# Altium PCB BMS.PcbDoc (part 2 of 2)
Units mm, origin at the board's own origin, x right, y up, seen from the top; angles counter-clockwise.
Board outline 152.4 x 101.6 mm, 20 copper layers (F.Cu, F.Mask, B.Cu, B.Mask, In1.Cu, F.SilkS, In2.Cu, B.SilkS, F.Adhes, B.Adhes, F.Paste, B.Paste, Dwgs.User, Cmts.User, Eco1.User, Eco2.User, Edge.Cuts, Margin, B.CrtYd, F.CrtYd); 59 components, 46 nets, 180 pads, 56 vias.
Unrouted connection lines stored in the file: 55.
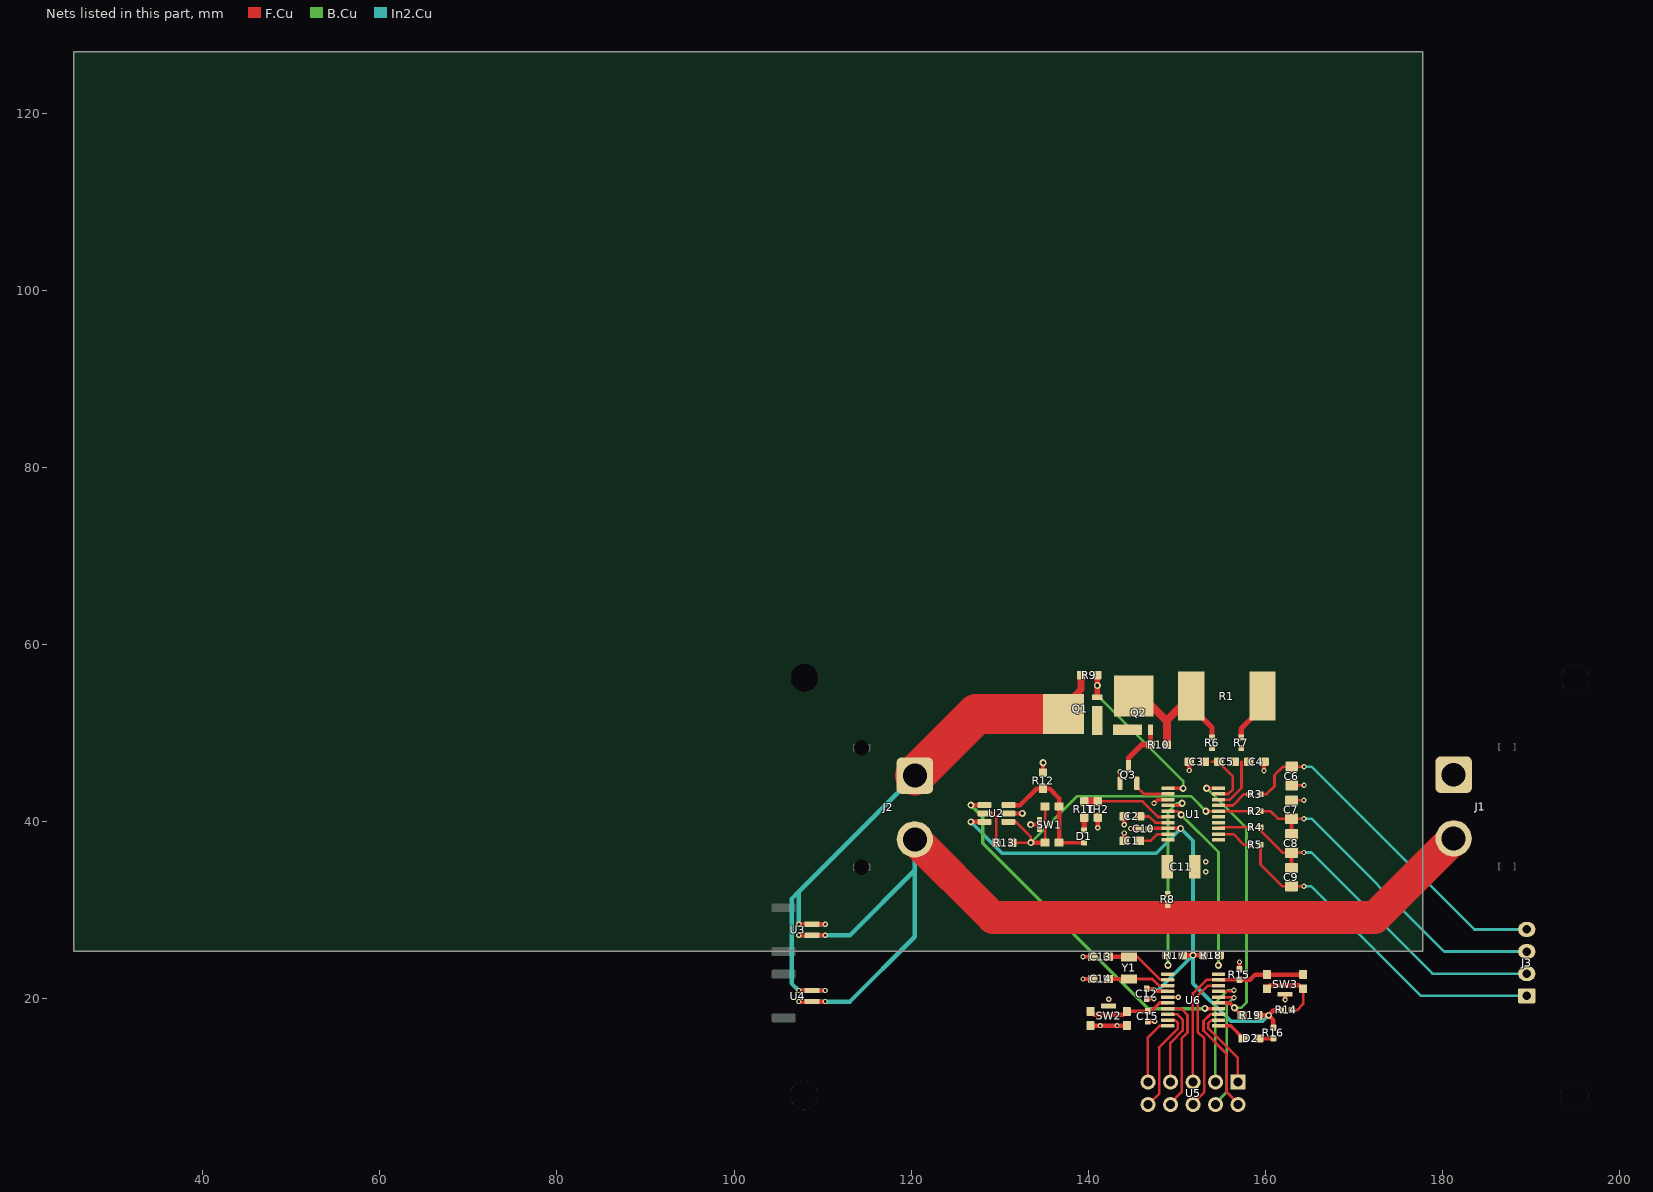
[diagram p11: the nets of this part, all layers, seen from the top]

## Footprints (in the part's own frame and the unit in brackets; to place one, negate y for a bottom-side part, rotate by r counter-clockwise, add the part's x,y. Pads: shape width x height; smd on the part's side, far side on the other; paste and mask are expansions set on the pad) (continued)
riven_sword_20mm_quality_mirrored [mm]
  F.SilkS region: 1800 vertices and 57 holes, not listed, extent -8.536,0.287 2.674,6.27
  F.SilkS region: 618 vertices and 59 holes, not listed, extent -2.404,2.179 5.659,5.091
  F.SilkS region: 702 vertices and 14 holes, not listed, extent -5.682,2.9 -3.173,5.551
  F.SilkS region: 537 vertices and 22 holes, not listed, extent 4.599,1.139 9.224,6.409
  F.SilkS region: 157 vertices and 5 holes, not listed, extent -9.217,3.808 -8.422,4.64
  F.SilkS region: -1.636,2.104 -1.628,2.102 -1.639,2.098 -1.641,2.097 -1.675,2.09 -1.722,2.082 -1.776,2.072 -1.832,2.063 -1.882,2.056 -1.92,2.051 -1.943,2.048 -1.999,2.041 -2.064,2.032 -2.134,2.022 -2.202,2.011 -2.265,2.001 -2.317,1.991 -2.353,1.984 -2.359,1.983 -2.423,1.968 -2.472,1.958 -2.51,1.951 -2.54,1.947 -2.551,1.946 -2.604,1.937 -2.673,1.924 -2.757,1.906 -2.853,1.883 -2.891,1.874 -2.94,1.863 -2.982,1.853 -3.009,1.847 -3.044,1.84 -3.096,1.827 -3.158,1.812 -3.223,1.796 -3.256,1.787 -3.306,1.773 -3.362,1.758 -3.42,1.741 -3.471,1.727 -3.509,1.715 -3.526,1.711 -3.565,1.701 -3.598,1.694 -3.601,1.694 -3.628,1.687 -3.645,1.681 -3.653,1.676 -3.678,1.666 -3.71,1.655 -3.715,1.653 -3.754,1.638 -3.8,1.618 -3.846,1.597 -3.862,1.589 -3.9,1.57 -3.923,1.56 -3.936,1.558 -3.941,1.562 -3.942,1.571 -3.94,1.578 -3.926,1.587 -3.915,1.588 -3.892,1.597 -3.884,1.601 -3.854,1.616 -3.818,1.631 -3.782,1.645 -3.753,1.656 -3.737,1.66 -3.732,1.66 -3.709,1.667 -3.68,1.68 -3.678,1.681 -3.658,1.69 -3.635,1.699 -3.605,1.709 -3.565,1.722 -3.512,1.738 -3.442,1.759 -3.393,1.773 -3.328,1.79 -3.257,1.809 -3.185,1.828 -3.117,1.845 -3.058,1.858 -3.014,1.868 -3,1.871 -2.934,1.885 -2.857,1.904 -2.777,1.924 -2.751,1.93 -2.703,1.94 -2.647,1.951 -2.592,1.962 -2.551,1.969 -2.496,1.979 -2.447,1.989 -2.412,1.998 -2.388,2.004 -2.364,2.009 -2.336,2.015 -2.301,2.021 -2.255,2.029 -2.195,2.039 -2.118,2.052 -2.018,2.067 -1.92,2.082 -1.836,2.092 -1.765,2.099 -1.702,2.103 -1.664,2.104
  F.SilkS region: 8.675,6.056 8.674,6.053 8.663,6.046 8.651,6.041 8.627,6.027 8.598,6.006 8.562,5.981 8.516,5.952 8.472,5.926 8.469,5.925 8.428,5.902 8.389,5.879 8.36,5.862 8.349,5.855 8.326,5.843 8.314,5.837 8.308,5.836 8.286,5.826 8.252,5.811 8.212,5.791 8.207,5.789 8.157,5.764 8.104,5.739 8.052,5.715 8.006,5.694 7.967,5.676 7.94,5.665 7.929,5.66 7.925,5.659 7.907,5.652 7.88,5.641 7.861,5.632 7.82,5.615 7.779,5.598 7.766,5.592 7.732,5.578 7.7,5.565 7.661,5.548 7.611,5.526 7.597,5.52 7.566,5.51 7.545,5.506 7.524,5.506 7.545,5.514 7.557,5.518 7.597,5.535 7.624,5.549 7.633,5.558 7.639,5.564 7.658,5.567 7.675,5.57 7.696,5.582 7.708,5.591 7.733,5.598 7.748,5.6 7.76,5.606 7.762,5.608 7.779,5.62 7.815,5.638 7.868,5.663 7.941,5.695 7.952,5.701 7.994,5.719 8.031,5.736 8.055,5.748 8.057,5.749 8.081,5.76 8.095,5.764 8.1,5.766 8.122,5.775 8.156,5.791 8.2,5.812 8.25,5.836 8.302,5.862 8.352,5.888 8.398,5.911 8.436,5.931 8.462,5.946 8.472,5.953 8.477,5.957 8.495,5.962 8.499,5.963 8.52,5.972 8.546,5.989 8.553,5.994 8.576,6.009 8.591,6.015 8.594,6.015 8.602,6.023 8.603,6.025 8.615,6.036 8.639,6.049 8.647,6.052 8.667,6.059
  F.SilkS region: 2.554,5.082 2.749,5.082 2.941,5.082 3.128,5.082 3.309,5.081 3.484,5.081 3.651,5.081 3.81,5.08 3.959,5.079 4.096,5.079 4.222,5.078 4.334,5.077 4.433,5.077 4.516,5.076 4.582,5.075 4.631,5.074 4.661,5.073 4.672,5.072 4.672,5.07 4.662,5.06 4.64,5.049 4.632,5.046 4.602,5.038 4.586,5.038 4.578,5.048 4.574,5.05 4.562,5.052 4.541,5.054 4.509,5.055 4.467,5.056 4.413,5.058 4.346,5.059 4.266,5.06 4.171,5.06 4.061,5.061 3.934,5.062 3.79,5.062 3.628,5.063 3.447,5.063 3.246,5.064 3.119,5.064 2.911,5.064 2.69,5.065 2.459,5.065 2.222,5.065 1.981,5.066 1.741,5.066 1.504,5.067 1.275,5.067 1.056,5.068 0.851,5.068 0.663,5.068 0.634,5.068 0.456,5.069 0.299,5.069 0.161,5.07 0.043,5.07 -0.056,5.07 -0.137,5.071 -0.199,5.071 -0.244,5.071 -0.27,5.072 -0.28,5.072 -0.274,5.073 -0.251,5.073 -0.213,5.074 -0.159,5.074 -0.09,5.075 -0.007,5.076 0.09,5.077 0.098,5.077 0.223,5.078 0.361,5.078 0.509,5.079 0.668,5.08 0.835,5.08 1.01,5.081 1.192,5.081 1.379,5.082 1.57,5.082 1.765,5.082 1.962,5.082 2.16,5.082 2.358,5.082
  F.SilkS region: 1.706,2.164 1.706,2.164 1.718,2.163 1.75,2.163 1.799,2.162 1.866,2.161 1.947,2.16 2.043,2.16 2.151,2.159 2.271,2.159 2.4,2.159 2.538,2.158 2.683,2.158 2.834,2.158 3,2.159 3.188,2.159 3.355,2.158 3.503,2.158 3.632,2.157 3.741,2.156 3.833,2.155 3.906,2.154 3.962,2.152 4.001,2.15 4.023,2.148 4.027,2.147 4.076,2.141 4.133,2.135 4.186,2.13 4.203,2.129 4.242,2.124 4.271,2.12 4.284,2.116 4.284,2.116 4.275,2.113 4.249,2.112 4.211,2.112 4.162,2.113 4.161,2.113 4.132,2.114 4.084,2.115 4.018,2.116 3.936,2.117 3.84,2.117 3.73,2.118 3.609,2.119 3.478,2.12 3.338,2.121 3.191,2.122 3.039,2.123 2.883,2.124 2.851,2.124 2.669,2.125 2.5,2.126 2.345,2.128 2.206,2.129 2.082,2.13 1.975,2.132 1.885,2.133 1.814,2.135 1.761,2.137 1.727,2.138 1.714,2.14 1.703,2.148 1.695,2.161 1.696,2.165
  F.SilkS region: 1.33,2.143 1.32,2.138 1.299,2.123 1.284,2.114 1.257,2.106 1.254,2.106 1.232,2.105 1.191,2.105 1.134,2.105 1.061,2.104 0.975,2.104 0.876,2.104 0.767,2.104 0.649,2.104 0.523,2.105 0.392,2.105 0.36,2.105 0.227,2.106 0.097,2.106 -0.027,2.106 -0.144,2.107 -0.252,2.107 -0.348,2.107 -0.431,2.107 -0.498,2.108 -0.549,2.108 -0.581,2.108 -0.591,2.108 -0.639,2.108 -0.677,2.11 -0.702,2.112 -0.709,2.114 -0.707,2.115 -0.689,2.116 -0.652,2.117 -0.597,2.118 -0.526,2.119 -0.441,2.121 -0.343,2.122 -0.233,2.123 -0.112,2.125 0.017,2.126 0.153,2.127 0.296,2.128 0.345,2.129 0.486,2.13 0.621,2.131 0.748,2.132 0.867,2.134 0.975,2.135 1.071,2.136 1.154,2.138 1.221,2.139 1.272,2.14 1.306,2.141 1.32,2.143 1.333,2.146
  F.SilkS region: -1.826,5.046 -1.818,5.036 -1.817,5.014 -1.822,4.989 -1.832,4.968 -1.842,4.953 -1.848,4.933 -1.848,4.933 -1.855,4.915 -1.872,4.895 -1.897,4.872 -2.463,4.876 -2.489,4.876 -2.604,4.877 -2.708,4.878 -2.801,4.88 -2.881,4.882 -2.946,4.883 -2.996,4.885 -3.027,4.887 -3.039,4.889 -3.04,4.89 -3.043,4.897 -3.035,4.903 -3.015,4.908 -2.982,4.913 -2.934,4.916 -2.87,4.92 -2.788,4.922 -2.686,4.925 -2.539,4.928 -2.405,4.931 -2.288,4.935 -2.189,4.938 -2.105,4.942 -2.036,4.945 -1.98,4.949 -1.935,4.954 -1.901,4.958 -1.876,4.964 -1.874,4.964 -1.849,4.973 -1.839,4.985 -1.837,5.01 -1.837,5.014 -1.834,5.037 -1.827,5.046
  F.SilkS region: -4.754,4.279 -4.735,4.264 -4.728,4.256 -4.72,4.235 -4.728,4.211 -4.752,4.178 -4.775,4.164 -4.809,4.16 -4.845,4.167 -4.875,4.186 -4.877,4.188 -4.893,4.209 -4.9,4.225 -4.896,4.238 -4.882,4.259 -4.863,4.277 -4.846,4.285 -4.843,4.28 -4.852,4.266 -4.867,4.24 -4.864,4.211 -4.843,4.187 -4.835,4.182 -4.819,4.176 -4.802,4.179 -4.775,4.191 -4.771,4.194 -4.747,4.208 -4.74,4.219 -4.744,4.233 -4.752,4.245 -4.765,4.259 -4.771,4.265 -4.775,4.278 -4.767,4.285
  F.SilkS region: -4.78,0.67 -4.793,0.655 -4.81,0.636 -4.825,0.62 -4.842,0.604 -4.863,0.586 -4.894,0.56 -4.937,0.525 -4.973,0.494 -5.026,0.448 -5.081,0.398 -5.129,0.352 -5.134,0.348 -5.173,0.311 -5.209,0.278 -5.237,0.254 -5.254,0.241 -5.254,0.241 -5.277,0.229 -5.285,0.231 -5.278,0.248 -5.27,0.258 -5.247,0.283 -5.212,0.317 -5.167,0.359 -5.115,0.406 -5.058,0.457 -4.999,0.508 -4.94,0.558 -4.883,0.605 -4.832,0.646 -4.788,0.68 -4.739,0.716
  F.SilkS region: 6.468,5.192 6.465,5.186 6.464,5.186 6.447,5.178 6.416,5.169 6.378,5.162 6.371,5.161 6.318,5.153 6.257,5.143 6.191,5.133 6.127,5.122 6.068,5.113 6.02,5.105 5.987,5.099 5.962,5.095 5.917,5.092 5.872,5.09 5.805,5.09 5.899,5.104 5.909,5.105 5.963,5.114 6.017,5.122 6.06,5.128 6.069,5.13 6.144,5.141 6.229,5.155 6.316,5.17 6.397,5.184 6.432,5.19 6.458,5.193
  F.SilkS region: 5.734,5.094 5.739,5.092 5.731,5.089 5.713,5.083 5.695,5.077 5.669,5.068 5.656,5.062 5.65,5.061 5.626,5.059 5.588,5.057 5.538,5.056 5.48,5.056 5.419,5.056 5.373,5.057 5.342,5.059 5.324,5.062 5.317,5.066 5.316,5.072 5.32,5.077 5.333,5.083 5.359,5.085 5.402,5.085 5.444,5.084 5.5,5.085 5.561,5.087 5.622,5.09 5.678,5.093 5.714,5.094
  F.SilkS region: 8.806,4.531 8.799,4.513 8.784,4.483 8.765,4.446 8.743,4.405 8.72,4.365 8.699,4.329 8.681,4.302 8.68,4.3 8.656,4.268 8.641,4.254 8.635,4.258 8.635,4.263 8.642,4.285 8.659,4.311 8.665,4.32 8.68,4.341 8.685,4.354 8.688,4.359 8.7,4.379 8.718,4.408 8.74,4.442 8.763,4.476 8.784,4.506 8.799,4.527 8.806,4.535
  F.SilkS region: 7.621,2.948 7.615,2.935 7.609,2.927 7.587,2.901 7.555,2.87 7.517,2.835 7.478,2.802 7.475,2.799 7.446,2.781 7.427,2.78 7.416,2.795 7.416,2.803 7.428,2.803 7.437,2.8 7.443,2.805 7.443,2.807 7.454,2.819 7.476,2.84 7.507,2.864 7.513,2.868 7.548,2.895 7.579,2.919 7.6,2.935 7.601,2.936 7.618,2.949
  F.SilkS region: 9.45,6.421 9.452,6.4 9.449,6.361 9.447,6.339 9.44,6.295 9.431,6.242 9.421,6.188 9.41,6.137 9.401,6.096 9.393,6.069 9.386,6.054 9.38,6.046 9.378,6.051 9.378,6.072 9.382,6.104 9.387,6.14 9.394,6.176 9.397,6.19 9.404,6.227 9.412,6.274 9.421,6.324 9.421,6.325 9.431,6.374 9.439,6.406 9.446,6.422
  F.SilkS region: -3.633,4.687 -3.641,4.676 -3.662,4.658 -3.691,4.637 -3.725,4.616 -3.759,4.598 -3.777,4.59 -3.824,4.575 -3.869,4.566 -3.881,4.564 -3.925,4.56 -3.953,4.559 -3.961,4.561 -3.951,4.565 -3.921,4.573 -3.87,4.585 -3.818,4.602 -3.771,4.619 -3.734,4.636 -3.712,4.65 -3.708,4.654 -3.689,4.666 -3.665,4.678 -3.644,4.687 -3.633,4.688
  F.SilkS region: -4.112,4.94 -4.127,4.922 -4.152,4.899 -4.184,4.873 -4.22,4.848 -4.255,4.827 -4.288,4.812 -4.331,4.795 -4.367,4.785 -4.392,4.781 -4.426,4.777 -4.441,4.778 -4.437,4.784 -4.416,4.796 -4.4,4.803 -4.361,4.822 -4.322,4.841 -4.318,4.842 -4.282,4.861 -4.238,4.885 -4.194,4.91 -4.181,4.918 -4.147,4.936 -4.123,4.946 -4.112,4.948
  F.SilkS region: 6.953,2.398 6.94,2.381 6.916,2.359 6.885,2.336 6.852,2.315 6.842,2.309 6.808,2.287 6.774,2.264 6.759,2.253 6.737,2.239 6.727,2.233 6.726,2.234 6.732,2.242 6.749,2.259 6.774,2.281 6.802,2.305 6.829,2.327 6.852,2.343 6.856,2.346 6.888,2.369 6.917,2.391 6.92,2.394 6.941,2.405 6.953,2.405
  F.SilkS region: -4.156,5.926 -4.16,5.922 -4.189,5.915 -4.222,5.911 -4.255,5.908 -4.29,5.9 -4.331,5.887 -4.394,5.867 -4.442,5.851 -4.476,5.839 -4.499,5.829 -4.515,5.822 -4.539,5.811 -4.559,5.806 -4.567,5.811 -4.562,5.815 -4.544,5.828 -4.517,5.845 -4.44,5.885 -4.342,5.914 -4.233,5.927 -4.208,5.928 -4.172,5.928
  F.SilkS region: 7.404,2.778 7.402,2.775 7.389,2.759 7.364,2.733 7.332,2.702 7.294,2.668 7.256,2.634 7.219,2.602 7.187,2.577 7.154,2.553 7.125,2.535 7.107,2.526 7.103,2.529 7.114,2.543 7.141,2.569 7.17,2.596 7.21,2.632 7.248,2.667 7.299,2.714 7.344,2.751 7.377,2.775 7.397,2.784
  F.SilkS region: -3.833,4.171 -3.832,4.147 -3.832,4.107 -3.832,4.047 -3.832,4.047 -3.833,3.987 -3.835,3.943 -3.838,3.917 -3.842,3.908 -3.846,3.918 -3.85,3.947 -3.854,3.997 -3.856,4.02 -3.858,4.059 -3.858,4.086 -3.856,4.106 -3.852,4.127 -3.845,4.153 -3.843,4.161 -3.839,4.176 -3.835,4.18
  F.SilkS region: 8.055,3.396 8.045,3.383 8.025,3.358 7.995,3.325 7.96,3.287 7.946,3.273 7.911,3.237 7.882,3.209 7.862,3.191 7.854,3.186 7.858,3.194 7.872,3.214 7.895,3.239 7.942,3.29 7.984,3.334 8.015,3.366 8.037,3.386 8.049,3.397 8.055,3.398
  F.SilkS region: 6.716,2.228 6.716,2.227 6.703,2.216 6.679,2.198 6.646,2.176 6.645,2.176 6.609,2.152 6.587,2.137 6.576,2.131 6.571,2.13 6.57,2.133 6.571,2.133 6.579,2.142 6.601,2.158 6.63,2.178 6.662,2.2 6.69,2.218 6.707,2.228 6.714,2.231
  F.SilkS region: 8.622,4.227 8.622,4.216 8.614,4.204 8.61,4.202 8.602,4.189 8.596,4.176 8.581,4.152 8.559,4.122 8.558,4.121 8.536,4.094 8.52,4.075 8.512,4.07 8.513,4.075 8.522,4.094 8.54,4.124 8.563,4.161 8.583,4.192 8.604,4.22 8.616,4.231
  F.SilkS region: -4.562,1.409 -4.556,1.388 -4.552,1.349 -4.55,1.29 -4.55,1.258 -4.551,1.226 -4.554,1.209 -4.557,1.212 -4.557,1.214 -4.563,1.243 -4.566,1.277 -4.566,1.279 -4.571,1.316 -4.583,1.348 -4.591,1.365 -4.593,1.383 -4.584,1.4 -4.583,1.402 -4.571,1.413
  F.SilkS region: -3.968,5.145 -3.948,5.132 -3.924,5.114 -3.991,5.049 -4.006,5.034 -4.034,5.008 -4.054,4.99 -4.063,4.983 -4.063,4.983 -4.058,4.992 -4.043,5.013 -4.02,5.041 -4.01,5.055 -3.986,5.086 -3.976,5.108 -3.976,5.124 -3.985,5.137 -3.992,5.148 -3.985,5.15
  F.SilkS region: -3.754,6.317 -3.754,6.317 -3.762,6.304 -3.78,6.282 -3.806,6.255 -3.807,6.253 -3.834,6.227 -3.857,6.209 -3.871,6.202 -3.872,6.206 -3.862,6.22 -3.842,6.241 -3.825,6.257 -3.801,6.283 -3.787,6.304 -3.785,6.306 -3.772,6.323 -3.759,6.327
  F.SilkS region: 9.036,4.971 9.039,4.957 9.037,4.939 9.029,4.926 9.025,4.921 9.019,4.903 9.015,4.891 9.001,4.873 8.989,4.866 8.979,4.863 8.979,4.869 8.986,4.889 8.998,4.916 9.012,4.943 9.024,4.964 9.032,4.973
  F.SilkS region: -3.649,2.8 -3.649,2.78 -3.654,2.751 -3.664,2.721 -3.678,2.693 -3.688,2.679 -3.706,2.66 -3.715,2.657 -3.717,2.671 -3.71,2.698 -3.693,2.737 -3.691,2.742 -3.675,2.774 -3.662,2.797 -3.655,2.806
  F.SilkS region: -0.803,2.115 -0.785,2.114 -0.786,2.113 -0.804,2.113 -0.839,2.112 -0.889,2.112 -0.938,2.112 -0.973,2.113 -0.992,2.113 -0.993,2.114 -0.975,2.115 -0.922,2.117 -0.859,2.117
  F.SilkS region: 9.464,6.583 9.465,6.56 9.466,6.551 9.464,6.52 9.46,6.499 9.455,6.488 9.452,6.488 9.452,6.507 9.457,6.546 9.46,6.575 9.463,6.588
  F.SilkS region: -3.954,1.713 -3.954,1.681 -3.954,1.657 -3.956,1.638 -3.962,1.639 -3.963,1.643 -3.966,1.666 -3.963,1.696 -3.962,1.697 -3.958,1.72 -3.955,1.725
  F.SilkS region: -3.481,5.48 -3.473,5.48 -3.471,5.478 -3.488,5.477 -3.52,5.476 -3.536,5.476 -3.563,5.477 -3.573,5.479 -3.564,5.48 -3.559,5.481 -3.52,5.482
  F.SilkS region: 6.789,5.261 6.764,5.252 6.738,5.247 6.719,5.245 6.71,5.247 6.716,5.253 6.722,5.256 6.747,5.263 6.779,5.269 6.826,5.275
  F.SilkS region: -3.719,2.597 -3.723,2.578 -3.729,2.558 -3.733,2.549 -3.74,2.547 -3.744,2.564 -3.741,2.579 -3.729,2.603 -3.72,2.614 -3.716,2.615
  F.SilkS region: -5.278,5.809 -5.275,5.785 -5.278,5.763 -5.286,5.754 -5.287,5.754 -5.293,5.767 -5.296,5.791 -5.296,5.796 -5.293,5.817 -5.286,5.822
  F.SilkS region: 6.69,5.242 6.69,5.233 6.682,5.227 6.661,5.223 6.656,5.223 6.646,5.226 6.654,5.233 6.657,5.235 6.676,5.242
  F.SilkS region: -1.868,5.048 -1.852,5.04 -1.852,5.026 -1.858,5.019 -1.878,5.016 -1.909,5.029 -1.934,5.043 -1.901,5.048 -1.897,5.048
  F.SilkS region: 6.557,2.116 6.544,2.103 6.53,2.095 6.519,2.093 6.521,2.099 6.535,2.112 6.549,2.12 6.559,2.122
  F.SilkS region: 5.939,3.245 5.945,3.227 5.944,3.22 5.935,3.212 5.929,3.216 5.925,3.233 5.927,3.245 5.935,3.248
  F.SilkS region: 8.679,5.993 8.68,5.983 8.678,5.98 8.669,5.973 8.668,5.973 8.665,5.983 8.665,5.986 8.676,5.994
  F.SilkS region: 6.87,5.282 6.872,5.282 6.873,5.278 6.857,5.277 6.855,5.277 6.838,5.278 6.839,5.282 6.847,5.284
  F.SilkS region: 3.155,2.981 3.158,2.972 3.151,2.967 3.131,2.962 3.12,2.964 3.117,2.972 3.124,2.978 3.144,2.983
  F.SilkS region: -4.612,0.812 -4.617,0.807 -4.636,0.791 -4.645,0.785 -4.65,0.787 -4.642,0.797 -4.616,0.816 -4.582,0.839
  F.SilkS region: -4.896,0.859 -4.89,0.841 -4.891,0.835 -4.9,0.826 -4.906,0.83 -4.911,0.848 -4.908,0.859 -4.9,0.863
  F.SilkS region: -4.335,4.128 -4.327,4.118 -4.327,4.116 -4.332,4.108 -4.333,4.108 -4.343,4.118 -4.344,4.122 -4.338,4.129
  F.SilkS region: -3.698,6.36 -3.697,6.348 -3.702,6.344 -3.719,6.345 -3.727,6.35 -3.724,6.361 -3.724,6.362 -3.71,6.366
  F.SilkS region: -3.97,6.157 -3.965,6.156 -3.971,6.154 -3.994,6.153 -4.009,6.153 -4.022,6.155 -4.017,6.157 -4.001,6.159
  F.SilkS region: -5.612,4.82 -5.609,4.801 -5.611,4.784 -5.619,4.775 -5.626,4.781 -5.629,4.801 -5.627,4.818 -5.619,4.827
  F.SilkS region: 7.671,2.984 7.669,2.982 7.659,2.973 7.654,2.977 7.655,2.979 7.666,2.989 7.672,2.992
  F.SilkS region: 8.087,3.432 8.084,3.428 8.075,3.42 8.074,3.42 8.072,3.427 8.083,3.437 8.089,3.44
  F.SilkS region: 7.087,2.505 7.084,2.501 7.075,2.493 7.074,2.493 7.071,2.499 7.083,2.51 7.088,2.512
  F.SilkS region: 1.671,2.387 1.663,2.379 1.654,2.373 1.644,2.369 1.648,2.379 1.65,2.381 1.667,2.389
  F.SilkS region: 1.451,2.224 1.448,2.219 1.439,2.212 1.437,2.212 1.435,2.218 1.446,2.228 1.452,2.231
  F.SilkS region: -4.426,4.046 -4.425,4.04 -4.436,4.035 -4.441,4.035 -4.452,4.04 -4.442,4.05 -4.439,4.052
  F.SilkS region: -5.582,4.875 -5.588,4.857 -5.597,4.845 -5.606,4.841 -5.608,4.854 -5.6,4.871 -5.588,4.879
  F.SilkS region: -8.44,3.868 -8.445,3.854 -8.451,3.857 -8.451,3.863 -8.444,3.881 -8.444,3.882 -8.437,3.884
  F.SilkS region: 6.484,2.063 6.485,2.059 6.477,2.056 6.471,2.056 6.47,2.063 6.471,2.064
  F.SilkS region: 8.831,4.566 8.831,4.561 8.824,4.559 8.823,4.561 8.824,4.573 8.827,4.575
  F.SilkS region: 9.06,5.01 9.059,4.999 9.054,4.996 9.052,5 9.053,5.016 9.057,5.021
  F.SilkS region: 4.827,2.063 4.829,2.059 4.82,2.056 4.815,2.056 4.813,2.063 4.815,2.064
  F.SilkS region: 8.54,5.879 8.539,5.874 8.533,5.872 8.531,5.874 8.533,5.886 8.536,5.888
  F.SilkS region: 8.571,5.91 8.57,5.905 8.564,5.903 8.563,5.905 8.564,5.917 8.567,5.919
  F.SilkS region: 8.505,5.865 8.506,5.862 8.498,5.858 8.492,5.859 8.491,5.865 8.492,5.866
  F.SilkS region: 8.369,5.782 8.371,5.779 8.362,5.775 8.357,5.776 8.356,5.782 8.357,5.783
  F.SilkS region: 8.317,5.761 8.319,5.758 8.31,5.754 8.305,5.755 8.303,5.761 8.305,5.762
  F.SilkS region: 8.213,5.709 8.215,5.706 8.206,5.702 8.201,5.703 8.199,5.709 8.201,5.71
  F.SilkS region: 8.161,5.678 8.163,5.675 8.154,5.671 8.149,5.672 8.147,5.678 8.149,5.679
  F.SilkS region: 8.119,5.657 8.121,5.654 8.112,5.65 8.107,5.651 8.105,5.657 8.107,5.658
  F.SilkS region: 7.989,5.605 7.994,5.601 7.983,5.599 7.972,5.599 7.969,5.604 7.973,5.606
  F.SilkS region: 7.88,5.553 7.881,5.55 7.873,5.546 7.867,5.546 7.866,5.553 7.867,5.554
  F.SilkS region: 7.473,5.48 7.475,5.477 7.466,5.473 7.461,5.474 7.46,5.48 7.461,5.481
  F.SilkS region: 7.098,5.355 7.1,5.352 7.091,5.348 7.086,5.349 7.084,5.355 7.086,5.356
  F.SilkS region: 2.462,2.636 2.464,2.632 2.455,2.629 2.45,2.629 2.448,2.636 2.45,2.637
  F.SilkS region: 2.421,2.615 2.422,2.612 2.414,2.608 2.408,2.609 2.407,2.615 2.408,2.616
  F.SilkS region: 2.368,2.583 2.37,2.58 2.361,2.576 2.356,2.577 2.355,2.583 2.356,2.585
  F.SilkS region: 2.337,2.563 2.339,2.559 2.33,2.556 2.325,2.556 2.323,2.563 2.325,2.564
  F.SilkS region: 1.483,2.25 1.484,2.247 1.476,2.243 1.47,2.244 1.469,2.25 1.47,2.251
  F.SilkS region: -4.556,0.857 -4.557,0.852 -4.563,0.851 -4.565,0.852 -4.563,0.864 -4.56,0.866
  F.SilkS region: -4.547,1.166 -4.547,1.155 -4.552,1.152 -4.554,1.156 -4.553,1.172 -4.549,1.177
  F.SilkS region: -4.568,1.478 -4.568,1.468 -4.573,1.465 -4.575,1.468 -4.574,1.485 -4.57,1.489
  F.SilkS region: -3.953,2.145 -3.954,2.134 -3.958,2.131 -3.96,2.135 -3.959,2.151 -3.955,2.156
  F.SilkS region: -3.756,2.514 -3.757,2.5 -3.761,2.501 -3.762,2.506 -3.761,2.527 -3.757,2.529
  F.SilkS region: -4.57,3.5 -4.569,3.497 -4.577,3.493 -4.583,3.494 -4.584,3.5 -4.583,3.502
  F.SilkS region: -3.515,4.604 -3.516,4.593 -3.521,4.59 -3.523,4.594 -3.522,4.61 -3.518,4.615
  F.SilkS region: -4.393,4.073 -4.391,4.07 -4.4,4.066 -4.406,4.067 -4.407,4.073 -4.405,4.075
  F.SilkS region: -4.081,4.969 -4.079,4.966 -4.088,4.962 -4.093,4.963 -4.094,4.969 -4.093,4.97
  F.SilkS region: -4.31,5.334 -4.308,5.331 -4.317,5.327 -4.322,5.328 -4.324,5.334 -4.322,5.335
  F.SilkS region: 7.685,3.009 7.68,3.004 7.675,3.009 7.68,3.014
  F.SilkS region: 7.842,3.165 7.836,3.16 7.831,3.165 7.836,3.17
  F.SilkS region: 8.133,3.478 8.128,3.472 8.123,3.478 8.128,3.483
  F.SilkS region: 8.154,3.509 8.149,3.504 8.144,3.509 8.149,3.514
  F.SilkS region: 6.508,2.082 6.503,2.076 6.498,2.082 6.503,2.087
  F.SilkS region: 5.445,1.842 5.44,1.837 5.435,1.842 5.44,1.847
  F.SilkS region: 8.644,5.957 8.639,5.952 8.633,5.957 8.639,5.962
  F.SilkS region: 8.415,5.811 8.409,5.806 8.404,5.811 8.409,5.817
  F.SilkS region: 8.029,5.624 8.024,5.619 8.019,5.624 8.024,5.629
  F.SilkS region: 5.299,2.915 5.294,2.91 5.289,2.915 5.294,2.92
  F.SilkS region: 7.769,5.499 7.763,5.494 7.758,5.499 7.763,5.504
  F.SilkS region: 6.946,5.301 6.94,5.296 6.935,5.301 6.94,5.306
  F.SilkS region: 3.185,2.998 3.179,2.993 3.174,2.998 3.179,3.004
  F.SilkS region: 1.976,2.582 1.971,2.576 1.966,2.582 1.971,2.587
  F.SilkS region: 1.726,2.425 1.721,2.42 1.716,2.425 1.721,2.431
  F.SilkS region: 1.695,2.405 1.689,2.399 1.684,2.405 1.689,2.41
  F.SilkS region: 1.622,2.353 1.617,2.347 1.611,2.353 1.617,2.358
  F.SilkS region: 1.507,2.269 1.502,2.264 1.497,2.269 1.502,2.274
  F.SilkS region: -4.723,0.727 -4.728,0.722 -4.733,0.727 -4.728,0.732
  F.SilkS region: -4.213,1.321 -4.218,1.316 -4.223,1.321 -4.218,1.326
  F.SilkS region: -4.546,1.113 -4.551,1.108 -4.556,1.113 -4.551,1.118
  F.SilkS region: -3.16,3.759 -3.165,3.754 -3.171,3.759 -3.165,3.764
  F.SilkS region: -8.557,4.238 -8.562,4.233 -8.567,4.238 -8.562,4.243
SOT-23 [mm]
  rrect25% 1.475x0.6 smd paste-1.475 mask-1.475: 1(-0.937,0.95) 2(-0.937,-0.95) 3(0.937,0)
  F.SilkS region: -1.162,1.51 -1.402,1.84 -0.923,1.84
  F.SilkS lines w0.254: -0.65,1.56 0,1.56 0.65,1.56 ; -0.65,-1.56 0,-1.56 0.65,-1.56
  F.CrtYd lines w0.254: -1.92,1.7 -1.92,-1.7 1.92,-1.7 1.92,1.7 -1.92,1.7
SOT-23-6_Handsoldering [mm]
  rrect25% 1.56x0.65 smd paste-1.56 mask-1.56: 1(-1.35,0.95) 2(-1.35,0) 3(-1.35,-0.95) 4(1.35,-0.95) 5(1.35,0) 6(1.35,0.95)
  F.SilkS region: -1.2,1.56 -1.44,1.89 -0.96,1.89
  F.SilkS lines w0.254: 0.9,1.61 0.1,1.61 -0.7,1.61 ; 0.9,-1.61 -0.9,-1.61
  F.CrtYd lines w0.254: 2.4,1.8 -2.4,1.8 -2.4,-1.8 2.4,-1.8 2.4,1.8
SW_SPST_CK_KMS2xxG [mm]
  rrect15% 0.9x1 smd paste-1 mask-1: 1(-2.05,0.8) 1(2.05,0.8) 2(-2.05,-0.8) 2(2.05,-0.8)
  rrect15% 1.7x0.55 smd paste-1.7 mask-1.7: SH(0,1.425)
  F.SilkS lines w0.254: -2.21,1.56 -1.11,1.56 ; 1.11,1.56 2.21,1.56 ; -2.21,0.04 -2.21,-0.04 ; 2.21,0.04 2.21,-0.04
  F.CrtYd lines w0.254: -2.75,1.95 2.75,1.95 2.75,-2.4 -2.75,-2.4 -2.75,1.95
TRANS_BSC014N04LSIATMA1 [mm]
  rect 1.2x0.6 smd paste-1.2 mask-1.2: 1(-2.775,-1.96)
  rect 1.2x3.3 smd paste-3.3 mask-3.3: 2(-2.775,0.66)
  rect 4.65x4.51 smd paste-4.65 mask-4.65: 3(1.05,-0.055)
  F.Mask region: 3.325,1.55 2.525,1.55 2.525,0.88 3.325,0.88 3.325,0.28 2.525,0.28 2.525,-0.39 3.325,-0.39 3.325,-0.99 2.525,-0.99 2.525,-1.66 3.325,-1.66 3.325,-2.26 -1.225,-2.26 -1.225,2.15 3.325,2.15
  F.Mask region: -2.225,-0.94 -3.325,-0.94 -3.325,-0.44 -2.825,-0.44 -2.825,0.33 -3.325,0.33 -3.325,0.83 -2.825,0.83 -2.825,1.6 -3.325,1.6 -3.325,2.1 -2.825,2.1 -2.825,2.26 -2.225,2.26
  F.Mask region: -2.225,-2.21 -3.325,-2.21 -3.325,-1.71 -2.225,-1.71
  F.SilkS circle w0.254: c-3.95,2 r0.158
  F.SilkS lines w0.254: 3,2.36 3,2.575 -3,2.575 -3,2.45 ; 3,-2.4 3,-2.575 -3,-2.575 -3,-2.4
  F.Paste region: -2.92,1.657 -3.284,1.657 -3.284,2.05 -2.92,2.05
  F.Paste region: -2.92,-2.167 -3.28,-2.167 -3.28,-1.76 -2.92,-1.76
  F.Paste region: -2.92,-0.893 -3.279,-0.893 -3.279,-0.49 -2.92,-0.49
  F.Paste region: -2.92,0.381 -3.277,0.381 -3.277,0.78 -2.92,0.78
  F.Paste region: -2.27,1.316 -2.732,1.316 -2.732,2.21 -2.27,2.21
  F.Paste region: -2.27,0.211 -2.73,0.211 -2.73,1.11 -2.27,1.11
  F.Paste region: -2.27,-0.891 -2.724,-0.891 -2.724,0.01 -2.27,0.01
  F.Paste region: -2.27,-2.163 -2.724,-2.163 -2.724,-1.76 -2.27,-1.76
  F.Paste region: 0.54,-1.662 -0.964,-1.662 -0.964,-0.155 0.54,-0.155
  F.Paste region: 0.54,0.045 -0.963,0.045 -0.963,1.545 0.54,1.545
  F.Paste region: 2.24,0.045 0.742,0.045 0.742,1.545 2.24,1.545
  F.Paste region: 2.24,-1.661 0.743,-1.661 0.743,-0.155 2.24,-0.155
  F.Paste region: 3.27,1.602 2.522,1.602 2.522,2.1 3.27,2.1
  F.Paste region: 3.27,-2.212 2.523,-2.212 2.523,-1.71 3.27,-1.71
  F.Paste region: 3.27,-0.943 2.529,-0.943 2.529,-0.44 3.27,-0.44
  F.Paste region: 3.27,0.331 2.53,0.331 2.53,0.83 3.27,0.83
  F.CrtYd lines w0.254: 3.625,2.825 -3.625,2.825 -3.625,-2.825 3.625,-2.825 3.625,2.825
TSSOP-20_4.4x6.5mm_P0.65mm [mm]
  rrect25% 1.475x0.4 smd paste-1.475 mask-1.475: 1(-2.863,2.925) 2(-2.863,2.275) 3(-2.863,1.625) 4(-2.863,0.975) 5(-2.863,0.325) 6(-2.863,-0.325) 7(-2.863,-0.975) 8(-2.863,-1.625) 9(-2.863,-2.275) 10(-2.863,-2.925) 11(2.863,-2.925) 12(2.863,-2.275) 13(2.863,-1.625) 14(2.863,-0.975) 15(2.863,-0.325) 16(2.863,0.325) 17(2.863,0.975) 18(2.863,1.625) 19(2.863,2.275) 20(2.863,2.925)
  F.SilkS region: -3.86,2.925 -4.19,2.685 -4.19,3.165
  F.SilkS lines w0.254: -2.2,-3.385 0,-3.385 2.2,-3.385 ; -2.2,3.385 0,3.385 2.2,3.385
  F.CrtYd lines w0.254: -3.85,-3.5 3.85,-3.5 3.85,3.5 -3.85,3.5 -3.85,-3.5

## Part data
C1 C2: library part C_0603_1608Metric_Pad1.08x0.95mm_HandSolder, "Capacitor SMD 0603 (1608 Metric), square (rectangular) end terminal, IPC-7351 nominal with elongated pad for handsoldering. (Body size source: IPC-SM-782 page 76, https://www.pcb-3d.com/wordpress/wp-content/uploads/ipc-sm-782a_amendment_1_and_2.pdf), generated with kicad-footprint-generator", Datasheet=~, Description="Unpolarized capacitor", Website=https://eu.mouser.com/ProductDetail/TDK/C1608X7R1H105K080AB?qs=efUn273yAhdzCWVW9RXgig%3D%3D, ki_fp_filters=C_*
C3 C4 C5 C13 C14: library part C_0603_1608Metric_Pad1.08x0.95mm_HandSolder, "Capacitor SMD 0603 (1608 Metric), square (rectangular) end terminal, IPC_7351 nominal with elongated pad for handsoldering. (Body size source: IPC-SM-782 page 76, https://www.pcb-3d.com/wordpress/wp-content/uploads/ipc-sm-782a_amendment_1_and_2.pdf), generated with kicad-footprint-generator", Datasheet=~, Description="Unpolarized capacitor", Website=https://eu.mouser.com/ProductDetail/Murata-Electronics/GCM188R71H104JA57D?qs=ui%252B2d9lVEI4ebGBmb9XKtA%3D%3D, ki_fp_filters=C_*
C6 C7 C8 C9: library part C_0805_2012Metric_Pad1.18x1.45mm_HandSolder, "Capacitor SMD 0805 (2012 Metric), square (rectangular) end terminal, IPC_7351 nominal with elongated pad for handsoldering. (Body size source: IPC-SM-782 page 76, https://www.pcb-3d.com/wordpress/wp-content/uploads/ipc-sm-782a_amendment_1_and_2.pdf, https://docs.google.com/spreadsheets/d/1BsfQQcO9C6DZCsRaXUlFlo91Tg2WpOkGARC1WS5S8t0/edit?usp=sharing), generated with kicad-footprint-generator", Datasheet=~, Description="Unpolarized capacitor", Website=http://eu.mouser.com/ProductDetail/Murata-Electronics/GCJ21BR71H105MA01K?qs=QzBtWTOodeVZ%252BTk8SNChEw%3D%3D, ki_fp_filters=C_*
C10 C12 C15: library part C_0402_1005Metric_Pad0.74x0.62mm_HandSolder, "Capacitor SMD 0402 (1005 Metric), square (rectangular) end terminal, IPC_7351 nominal with elongated pad for handsoldering. (Body size source: IPC-SM-782 page 76, https://www.pcb-3d.com/wordpress/wp-content/uploads/ipc-sm-782a_amendment_1_and_2.pdf), generated with kicad-footprint-generator", Datasheet=~, Description="Unpolarized capacitor", ki_fp_filters=C_*
  C10: Website=https://eu.mouser.com/ProductDetail/Murata-Electronics/GCQ1555C1H4R7WB01D?qs=0lQeLiL1qyYRZt16ZY6xZA%3D%3D
  C12 C15: Website=https://eu.mouser.com/ProductDetail/Murata-Electronics/GCM188R71H104JA57D?qs=ui%252B2d9lVEI4ebGBmb9XKtA%3D%3D
C11: library part C_1210_3225Metric_Pad1.33x2.70mm_HandSolder, "Capacitor SMD 1210 (3225 Metric), square (rectangular) end terminal, IPC_7351 nominal with elongated pad for handsoldering. (Body size source: IPC-SM-782 page 76, https://www.pcb-3d.com/wordpress/wp-content/uploads/ipc-sm-782a_amendment_1_and_2.pdf), generated with kicad-footprint-generator", Datasheet=~, Description="Unpolarized capacitor", Website=https://www.mouser.bg/ProductDetail/Murata-Electronics/GRM32ER71J106KA12L?qs=eeBpzGFlv%252B%2FlkjOiPI7fBw%3D%3D, ki_fp_filters=C_*
D1: library part D_SOD-523, "http://www.diodes.com/datasheets/ap02001.pdf p.144", Datasheet=https://www.diodes.com/assets/Datasheets/ds30396.pdf, Description="75V 0.15A Fast switching Diode, SOD-523", Sim.Device=D, Sim.Pins="1=K 2=A", ki_fp_filters=D*SOD?523*
D2: library part D_0603_1608Metric_Pad1.05x0.95mm_HandSolder, "Diode SMD 0603 (1608 Metric), square (rectangular) end terminal, IPC_7351 nominal, (Body size source: http://www.tortai-tech.com/upload/download/2011102023233369053.pdf), generated with kicad-footprint-generator", Datasheet=~, Description="Light emitting diode", ki_fp_filters="LED* LED_SMD:* LED_THT:*"
G***: library part riven_sword_20mm_quality
H1 H2 H3 H4: library part MountingHole_3.2mm_M3_DIN965, "Mounting Hole 3.2mm, no annular, M3, DIN965", Datasheet=~, Description="Mounting Hole without connection", ki_fp_filters=MountingHole*
J1: library part AMASS_XT60PW-M_1x02_P7.20mm_Horizontal, "Connector XT60 Horizontal PCB Female, https://www.tme.eu/Document/b13629717d44ae038681dba08d18c0b6/XT60PW-M.pdf", MAXIMUM_PACKAGE_HEIGHT="16.00 mm", Package=Package, MANUFACTURER=AMASS, MF=AMASS, Price=None, Check_prices=https://www.snapeda.com/parts/XT60-M/AMASS/view-part/?ref=eda, STANDARD="IPC 7351B", PARTREV=V1.2, SnapEDA_Link=https://www.snapeda.com/parts/XT60-M/AMASS/view-part/?ref=snap, MP=XT60-M, Description_1="\n                        \n                            Plug; DC supply; XT60; male; PIN: 2; for cable; soldered; 30A; 500V\n                        \n", Availability="Not in stock"
J2: library part AMASS_XT60PW-F_1x02_P7.20mm_Horizontal, "Connector XT60 Horizontal PCB Female, https://www.tme.eu/Document/1191bc2fa3aee3c446e5a895fd8f7983/XT60PW-F.pdf", MAXIMUM_PACKAGE_HEIGHT="16.00 mm", Package=Package, MANUFACTURER=AMASS, MF=AMASS, Price=None, Check_prices=https://www.snapeda.com/parts/XT60-M/AMASS/view-part/?ref=eda, STANDARD="IPC 7351B", PARTREV=V1.2, SnapEDA_Link=https://www.snapeda.com/parts/XT60-M/AMASS/view-part/?ref=snap, MP=XT60-M, Description_1="\n                        \n                            Plug; DC supply; XT60; male; PIN: 2; for cable; soldered; 30A; 500V\n                        \n", Availability="Not in stock"
J3: library part JST_XH_S4B-XH-A_1x04_P2.50mm_Horizontal, "JST XH series connector, S4B-XH-A (http://www.jst-mfg.com/product/pdf/eng/eXH.pdf), generated with kicad-footprint-generator", Package=None, Description="New Gi Conn2.5 Hdr Asmbly 3p Red D1.5, 3-1971800-3", Comment=4-1971800-1, Check_prices=https://www.snapeda.com/parts/4-1971800-1/TE+Connectivity/view-part/?ref=eda, MF="TE Connectivity", Price=None, TE_PURCHASE_URL=https://www.te.com/usa-en/product-3-1971800-3.html?te_bu=Cor&te_type=disp&te_campaign=seda_glo_cor-seda-global-disp-prtnr-fy19-seda-model-bom-cta_sma-317_1&elqCampaignId=32493, SnapEDA_Link=https://www.snapeda.com/parts/4-1971800-1/TE+Connectivity/view-part/?ref=snap, MP=4-1971800-1, EU_RoHS_Compliance=Compliant, Availability="In Stock", Description_1="\n                        \n                            Connector Header Through Hole 4 position 0.098 (2.50mm)\n                        \n"
Q1 Q2: library part TRANS_BSC014N04LSIATMA1, ki_fp_filters=SOT?23*
Q3: library part SOT-23, "SOT, 3 Pin (JEDEC TO-236 Var AB https://www.jedec.org/document_search?search_api_views_fulltext=TO-236), generated with kicad-footprint-generator ipc_gullwing_generator.py", Datasheet=http://assets.nexperia.com/documents/data-sheet/BSS84.pdf, Description="-0.13A Id, -50V Vds, P-Channel MOSFET, SOT-23", Website=https://eu.mouser.com/ProductDetail/onsemi-Fairchild/BSS84?qs=FOlmdCx%252BAA0e83h5MpSc0g%3D%3D, ki_fp_filters=SOT?23*
R1: library part R_3920, Datasheet=~, Description=Resistor, ki_fp_filters=R_*
R2 R3 R4 R5 R6 R7 R8 R14 R15 R16: library part R_0402_1005Metric_Pad0.72x0.64mm_HandSolder, "Resistor SMD 0402 (1005 Metric), square (rectangular) end terminal, IPC_7351 nominal with elongated pad for handsoldering. (Body size source: IPC-SM-782 page 72, https://www.pcb-3d.com/wordpress/wp-content/uploads/ipc-sm-782a_amendment_1_and_2.pdf), generated with kicad-footprint-generator", Datasheet=~, Description=Resistor, Website=https://store.comet.bg/Catalogue/Product/36541/, ki_fp_filters=R_*
R9 R10 R11 R12 R13 R17 R18 R19 TH2: library part R_0603_1608Metric_Pad0.98x0.95mm_HandSolder, "Resistor SMD 0603 (1608 Metric), square (rectangular) end terminal, IPC_7351 nominal with elongated pad for handsoldering. (Body size source: IPC-SM-782 page 72, https://www.pcb-3d.com/wordpress/wp-content/uploads/ipc-sm-782a_amendment_1_and_2.pdf), generated with kicad-footprint-generator", Datasheet=~
  R9 R10: Description=Resistor, Website=https://store.comet.bg/Catalogue/Product/4430/, ki_fp_filters=R_*
  R11 R12 R13 R17 R18 R19: Description=Resistor, ki_fp_filters=R_*
  TH2: Description="Temperature dependent resistor, negative temperature coefficient", ki_fp_filters="*NTC* *Thermistor* PIN?ARRAY* bornier* *Terminal?Block* R_*"
REF**: library part riven_sword_20mm_quality_mirrored
SW1 SW2 SW3: library part SW_SPST_CK_KMS2xxG, "Microminiature SMT Side Actuated, 4.2 x 2.8 x 1.42mm, https://www.ckswitches.com/media/1482/kms.pdf", Datasheet=https://www.ckswitches.com/media/1482/kms.pdf, Description="Microminiature SMT Side Actuated, 4.2 x 2.8 x 1.42mm, without pegs, with shield pin", ki_fp_filters=*SW*KMS2*G*
U1 U6: library part TSSOP-20_4.4x6.5mm_P0.65mm, "TSSOP, 20 Pin (JEDEC MO-153 Var AC https://www.jedec.org/document_search?search_api_views_fulltext=MO-153), generated with kicad-footprint-generator ipc_gullwing_generator.py", ki_fp_filters=TSSOP*4.4x6.5mm*P0.65mm*
  U1: Datasheet=http://www.ti.com/lit/ds/symlink/bq76920.pdf, Description="Lithium battery monitor, 3-5 cells, integrated balancing, I2C interface, TSSOP-20", Website=https://www.mouser.bg/ProductDetail/Murata-Electronics/NCP18XH103F03RB?qs=k3rQb2PKXqkF9YvF09qsvw%3D%3D
  U6: Datasheet=https://www.st.com/resource/en/datasheet/stm32c011f6.pdf, Description="STMicroelectronics Arm Cortex-M0+ MCU, 32KB flash, 6KB RAM, 48 MHz, 2.0-3.6V, 18 GPIO, TSSOP20"
U2: library part SOT-23-6_Handsoldering, "6-pin SOT-23 package, Handsoldering", Datasheet=http://www.ti.com/lit/ds/symlink/sn74lvc1t45.pdf, Description="Single-Bit Dual-Supply Bus Transceiver With Configurable Voltage Translation and 3-State Outputs, SOT-363", ki_fp_filters=*SC?70*
U3 U4: library part JST_GH_SM02B-GHS-TB_1x02-1MP_P1.25mm_Horizontal, "JST GH series connector, SM02B-GHS-TB (http://www.jst-mfg.com/product/pdf/eng/eGH.pdf), generated with kicad-footprint-generator"
U5: library part PinHeader_2x05_P2.54mm_Horizontal, "Through hole angled pin header, 2x05, 2.54mm pitch, 6mm pin length, double rows"
Y1: library part NX3215SA-32.768K-STD-MUA-8, Datasheet=~, Description="Two pin crystal", ki_fp_filters=Crystal*

## Via types
v1: diameter 0.6, hole 0.3, F.Cu to B.Cu, tented both sides, 37 vias
v2: diameter 0.8, hole 0.4, F.Cu to B.Cu, tented both sides, 19 vias

## Nets (pads, with @x,y where several pads share a name; then routed paths per layer and width w, separated by ;. In a path a pad name is that pad's centre, name@x,y a point inside that pad or via, vN(x,y) a via of type N, cw(c..) or ccw(c..) an arc to the next point about the centre after c; other vN are vias at no path point)
+3.3V: C10.2 C12.1 R14.1 R16.2 R17.1 R18.1 R19.1 U1.8 U2.6 U6.4 | length 75.4
  F.Cu w0.3: v2@150.45,39.245 v2(150.454,39.24)
  F.Cu w0.4: C12.1@146.613,21.132 147.332,21.133 v1(147.475,20.99) 147.625,20.84 U6.4@149,20.84 ; C10.2@146.873,39.245 U1.8@149.022,39.245 v2@150.45,39.245
  F.Cu w0.5: v2(126.75,39.99) U2.6@128.3,39.99 ; R17.1@150.7,24.94 R18.1@153.025,24.94 ; R19.1@159.199,18.14 v2(160.387,18.14) ; R16.2@160.937,16.737 160.937,17.59 v2(160.387,18.14) ; R14.1@161.799,18.74 160.987,18.74 v2(160.387,18.14)
  In2.Cu w0.4: v2(126.75,39.99) 130.275,36.465 147.679,36.465 v2(150.454,39.24) 151.851,37.844 151.851,21.739 156.1,17.49 159.737,17.49 v2(160.387,18.14) ; v1(147.475,20.99) 147.925,20.99 151.85,24.915 v2(151.85,24.94)
ALERT: R19.2 U1.20 U6.15 | length 32.3
  F.Cu w0.3: v2(153.393,43.793) v2@153.395,43.795
  F.Cu w0.4: v2@153.395,43.795 U1.20@154.747,43.795 ; U6.15@154.725,19.54 155.974,19.54 R19.2@157.374,18.14
  B.Cu w0.3: v2(153.393,43.793) 157.9,39.286 157.9,19.59 157.306,18.996 v2(156.518,18.996)
BMS_GND: J2.1 Q1.3 R9.1 U3.1 U4.1 | length 70.1
  F.Cu w0.5: v1(107.3,20.94) v1(110.3,20.94) ; v1(107.3,28.44) U3.1@108.8,28.44 v1(110.3,28.44)
  F.Cu w0.8: Q1.3@137.225,52.965 139.212,54.952 R9.1@139.212,56.565
  F.Cu w4.5: J2.1@120.425,45.215 127.37,52.16 Q1.3@137.225,52.16
  In2.Cu w0.5: v1(110.3,20.94) v1(107.3,20.94) 106.499,21.741 106.499,31.289 107.3,32.09 ; v1(110.3,28.44) v1(107.3,28.44) 107.3,32.09 ; J2.1@120.425,45.215 107.3,32.09
Net-(C6-Pad2): C6.2 J3.4 R3.2 | length 39.7
  F.Cu w0.3: R3.2@159.473,43.115 160.15,43.115 161.05,44.015 161.05,45.27 161.99,46.21 C6.2@162.997,46.21 163.007,46.22 v1(164.4,46.22)
  In2.Cu w0.3: v1(164.4,46.22) 165.245,46.22 183.625,27.84 J3.4@189.555,27.84
Net-(C7-Pad1): C7.1 C8.2 J3.3 R2.2 | length 38.4
  F.Cu w0.3: R2.2@159.475,41.19 160.6,41.19 161.445,40.345 C7.1@162.967,40.345 ; C7.1@162.977,40.335 162.987,40.345 v1(164.38,40.345)
  F.Cu w0.5: C8.2@162.977,38.59 C7.1@162.977,40.335
  In2.Cu w0.3: v1(164.38,40.345) 165.225,40.345 180.23,25.34 J3.3@189.555,25.34
Net-(C8-Pad1): C8.1 C9.2 J3.2 R4.2 | length 39
  F.Cu w0.3: R4.2@159.475,39.385 159.475,39.015 161.975,36.515 C8.1@162.977,36.515 162.987,36.525 v1(164.38,36.525)
  F.Cu w0.5: C9.2@162.977,34.78 C8.1@162.977,36.515
  In2.Cu w0.3: 164.38,36.465 v1(164.38,36.525) 165.225,36.525 178.91,22.84 J3.2@189.555,22.84
Net-(C9-Pad1): C9.1 J3.1 R5.2 | length 38.4
  F.Cu w0.3: R5.2@159.475,37.395 159.475,35.195 161.965,32.705 C9.1@162.977,32.705 162.987,32.715 v1(164.38,32.715)
  In2.Cu w0.3: v1(164.38,32.715) 165.225,32.715 177.6,20.34 J3.1@189.555,20.34
Net-(D1-A): D1.2 R12.1 SW1.2 U2.3 | length 14.8
  F.Cu w0.4: SW1.2@136.725,37.64 D1.2@139.55,37.64
  F.Cu w0.5: U2.3@131,41.89 132.35,41.89 134.187,43.727 R12.1@134.908,43.727 135.67,43.727 136.725,42.673 SW1.2@136.725,41.74 SW1.2@136.725,37.64
Net-(D1-K): D1.1 R11.2 | length 1.4
  F.Cu w0.6: D1.1@139.555,39.044 R11.2@139.555,40.477
Net-(D2-A): D2.2 R16.1 | length 1.6
  F.Cu w0.4: D2.2@159.269,15.52 R16.1@160.914,15.52
Net-(D2-K): D2.1 U6.11 | length 3.4
  F.Cu w0.4: U6.11@154.725,16.94 156.099,16.94 D2.1@157.519,15.52
Net-(Q1-G): Q1.1 R9.2 U1.1 | length 19.8
  F.Cu w0.3: v2@150.72,43.795 v2(150.734,43.78)
  F.Cu w0.4: U1.1@149.022,43.795 v2@150.72,43.795
  F.Cu w0.6: Q1.1@141.05,54.065 R9.2@141.05,56.552
  B.Cu w0.3: v2(141.054,55.395) 141.054,54.288 150.734,44.608 v2(150.734,43.78)
Net-(Q1-S): Q1.2 Q2.2
Net-(Q2-D): Q2.3 R1.1 R6.1 R10.1 | length 15
  F.Cu w0.6: R1.1@151.652,52.988 154.003,50.637 R6.1@154.003,49.521
  F.Cu w0.9: Q2.3@146.067,54.215 148.892,51.39 R10.1@148.892,48.69 ; 148.892,51.447 R1.1@151.652,54.207
Net-(Q2-G): Q2.1 Q3.3 R10.2 | length 5.8
  F.Cu w0.6: Q3.3@144.554,46.227 144.554,47.19 146.055,48.69 R10.2@147.067,48.69 ; R10.2@147.06,48.697 Q2.1@147.06,50.39
Net-(Q3-S): Q3.2 U1.2 | length 3.8
  F.Cu w0.3: Q3.2@145.504,43.946 146.306,43.145 U1.2@149.022,43.145
Net-(R14-Pad2): R14.2 SW3.1 | length 7.6
  F.Cu w0.3: R14.2@162.994,18.74 163.65,18.74 164.3,19.39 SW3.1@164.3,21.14
  F.Cu w0.5: SW3.1@160.2,21.14 160.6,21.54 163.825,21.54 SW3.1@164.175,21.19
Net-(U1-BAT): C11.2 R8.1 U1.10
Net-(U1-CAP1): C2.2 U1.7 | length 3.5
  F.Cu w0.3: C2.2@145.812,40.602 146.887,40.602 147.595,39.895 U1.7@149.022,39.895
Net-(U1-REGSRC): C1.2 U1.9 | length 3.5
  F.Cu w0.3: C1.2@145.8,37.84 147.036,37.84 147.786,38.59 U1.9@149.017,38.59
Net-(U1-SRN): C3.2 C5.1 R6.2 U1.19 | length 6.4
  F.Cu w0.3: 153.95,46.79 154.7,46.79 156.35,45.14 156.35,43.665 155.83,43.145 U1.19@154.747,43.145
Net-(U1-SRP): C4.2 C5.2 R7.2 U1.18 | length 6.1
  F.Cu w0.3: U1.18@154.747,42.495 156.005,42.495 157.325,43.815 157.325,46.79
Net-(U1-TS1): R11.1 TH2.2 U1.6 | length 10.2
  F.Cu w0.3: TH2.2@141.105,42.302 146.146,42.302 147.903,40.545 U1.6@149.022,40.545
  F.Cu w0.9: R11.1@139.555,42.302 TH2.2@141.105,42.302
Net-(U1-VC0): R3.1 U1.17 | length 4.1
  F.Cu w0.3: U1.17@154.747,41.845 156.355,41.845 157.625,43.115 R3.1@158.278,43.115
Net-(U1-VC1): R2.1 R13.2 SW1.1 U1.16 U2.1 | length 39.2
  F.Cu w0.3: U2.1@131,39.99 131.85,39.99 133.535,38.305 v2(133.535,37.64) R13.2@131.437,37.64 ; SW1.1@135.175,37.69 SW1.1@135.175,41.69 ; v2(153.304,41.19) 153.31,41.195 U1.16@154.747,41.195 157.35,41.195 157.355,41.19 R2.1@158.28,41.19
  F.Cu w0.5: v2(133.535,37.64) SW1.1@135.125,37.64
  B.Cu w0.3: v2(133.535,37.64) 133.535,37.65 138.775,42.89 151.604,42.89 v2(153.304,41.19)
Net-(U1-VC2): R4.1 R5.1 U1.12 U1.13 U1.14 U1.15 | length 7.3
  F.Cu w0.3: U1.12@154.747,38.595 156.42,38.595 157.62,37.395 R5.1@158.28,37.395 ; U1.13@154.802,39.3 U1.13@154.747,39.245 154.867,39.365 157.902,39.365 157.905,39.368
Net-(U2-DIR): R13.1 U2.5 | length 4.4
  F.Cu w0.3: U2.5@128.3,40.94 129.275,40.94 129.625,40.59 R13.1@129.625,37.653
Net-(U6-PC14): C13.1 U6.2 Y1.2 | length 7.8
  F.Cu w0.3: Y1.2@144.624,24.74 145.568,24.74 148.168,22.14 U6.2@149,22.14
  F.Cu w0.5: C13.1@142.274,24.74 Y1.2@144.624,24.74
Net-(U6-PC15): C14.1 U6.3 Y1.1 | length 6.7
  F.Cu w0.3: Y1.1@144.975,22.24 147.246,22.24 147.996,21.49 U6.3@149,21.49
  F.Cu w0.5: C14.1@142.274,22.24 Y1.1@144.624,22.24
Net-(U6-PF2): C15.1 SW2.1 U6.6 | length 8.9
  F.Cu w0.4: SW2.1@144.38,18.583 C15.1@146.725,18.582 147.142,18.583 148.1,19.54 U6.6@149,19.54
  F.Cu w0.5: SW2.1@140.275,18.578 140.675,18.177 SW2.1@143.975,18.177
PA0: U5.8 U6.7 | length 13.3
  F.Cu w0.3: U6.7@149,18.89 150.525,18.89 151.238,18.177 151.238,16.174 150.574,15.511 150.574,9.48 U5.8@149.294,8.2
PA1: U5.7 U6.8 | length 9.4
  F.Cu w0.3: U6.8@149,18.24 150.1,18.24 150.687,17.652 150.687,16.402 149.294,15.009 U5.7@149.294,10.74
PA2: U5.10 U6.9 | length 11.9
  F.Cu w0.3: U5.10@146.78,8.05 148.05,9.32 148.05,14.497 ; 148.004,14.497 150.138,16.63 150.138,17.25 149.797,17.59 U6.9@149,17.59
PA3: U5.9 U6.10 | length 7.7
  F.Cu w0.3: U5.9@146.754,10.74 146.754,15.644 148.05,16.94 U6.10@149,16.94
PA5: U5.1 U6.12 | length 9.2
  F.Cu w0.3: U6.12@154.725,17.59 153.928,17.59 153.588,17.25 153.588,16.63 156.914,13.303 U5.1@156.914,10.74
PA6: U5.2 U6.13 | length 12.9
  F.Cu w0.3: U6.13@154.725,18.24 153.8,18.24 153.037,17.478 153.037,16.402 155.664,13.775 155.664,9.45 U5.2@156.914,8.2
PA11: U5.4 U6.16 | length 14.6
  F.Cu w0.3: U6.16@154.725,20.19 156.4,20.19 v1(156.475,20.115) v1@156.475,20.14
  B.Cu w0.3: U5.4@154.374,8.2 155.664,9.49 155.664,19.329 v1@156.475,20.14
PA12: U5.3 U6.17 | length 13.3
  F.Cu w0.3: U6.17@154.725,20.84 156.35,20.84 v1(156.475,20.965) v1@156.475,20.94
  B.Cu w0.3: U5.3@154.374,10.74 154.374,19.564 155.75,20.94 v1@156.475,20.94
PA13: U5.6 U6.18 | length 15.8
  F.Cu w0.3: U5.6@151.834,8.2 153.124,9.49 153.124,15.538 152.385,16.277 152.385,20.325 153.55,21.49 U6.18@154.725,21.49
PA14: R15.1 SW3.2 U5.5 U6.19 | length 23
  F.Cu w0.3: U5.5@151.834,10.74 151.834,20.624 153.35,22.14 U6.19@154.725,22.14 ; 156.697,22.14 156.699,22.142
  F.Cu w0.4: U6.19@154.725,22.14 156.697,22.14
  F.Cu w0.5: R15.1@156.899,22.142 156.902,22.14 158.297,22.14 158.897,22.74 SW3.2@160.2,22.74 SW3.2@164.3,22.74
PACK+: J1.2 J2.2 R8.2 U3.2 U4.2 | length 121
  F.Cu w0.5: v1(107.3,19.69) v1(110.3,19.69) ; v1(107.3,27.19) v1(110.3,27.19)
  F.Cu w3.7: J2.2@120.425,38.015 129.25,29.19 172.375,29.19 J1.2@181.3,38.115
  In2.Cu w0.5: v1(107.3,19.69) 113.1,19.69 120.425,27.015 J2.2@120.425,38.015 120.425,34.515 113.1,27.19 v1(107.3,27.19)
PACK-: C1.1 C2.1 C3.1 C4.1 C6.1 C7.2 C10.1 C11.1 C12.2 C13.2 C14.2 C15.2 J1.1 Q3.1 R1.2 R7.1 R12.2 R15.2 SW1.SH SW2.2 SW2.SH SW3.SH TH2.1 U1.3 U2.2 U6.5 | length 30.4
  F.Cu w0.3: v1(143.6,45.665) 143.6,44.357 Q3.1@143.604,44.352 ; U6.5@149,20.19 v1(150.2,20.19) ; C7.2@162.977,42.41 162.987,42.42 v1(164.38,42.42) ; C6.1@162.997,44.135 163.007,44.145 v1(164.4,44.145)
  F.Cu w0.4: v1(139.425,22.24) C14.2@140.549,22.24 ; v1(139.425,24.74) C13.2@140.549,24.74 ; C12.2@146.613,19.997 v1(147.438,19.997) ; v1(147.45,42.09) 147.855,42.495 U1.3@149.022,42.495
  F.Cu w0.5: U2.2@131,40.94 v2(132.575,40.94) ; v2(133.516,39.69) SW1.SH@134.5,39.69 ; R12.2@134.908,45.552 v2(134.908,46.665) ; SW2.2@140.275,16.977 v1(141.375,16.977) SW2.2@144.375,16.977 ; v1(141.1,39.34) 141.105,39.344 TH2.1@141.105,40.477 ; C1.1@144.075,37.84 v1(144.075,38.727) ; v1@144.087,39.69 C2.1@144.087,40.602 ; v1(144.8,39.24) C10.1@145.732,39.24 ; C15.2@146.725,17.447 v1(147.525,17.447) ; v1(151.412,45.79) C3.1@151.412,46.79 ; R15.2@157.099,23.337 v1(157.099,24.164) ; v1(159.875,45.759) C4.1@159.875,46.79 ; v1@162.25,19.943 SW3.SH@162.25,20.515
  F.Cu w0.6: R7.1@157.305,49.521 157.305,50.544 R1.2@159.706,52.946
  other v1: 143.275,16.977 162.252,19.89 142.325,19.94 153.29,34.34 153.29,35.5 144.075,39.678
PWROFF: U2.4 U6.14 | length 40.8
  F.Cu w0.4: v2(153.185,18.915) 153.21,18.89 U6.14@154.725,18.89
  F.Cu w0.5: v2(126.75,41.89) U2.4@128.3,41.89
  B.Cu w0.4: v2(126.75,41.89) 128.1,40.54 128.1,37.59 146.8,18.89 153.16,18.89 v2(153.185,18.915)
SCL: R18.2 U1.5 U6.20 | length 20.4
  F.Cu w0.3: U1.5@149.022,41.195 150.098,41.195 v2(150.497,40.796)
  B.Cu w0.3: v2(150.497,40.796) 154.726,36.567 v2(154.725,23.79)
SDA: R17.2 U1.4 U6.1 | length 21
  F.Cu w0.3: U1.4@149.022,41.845 150.377,41.845 v2(150.622,42.09)
  B.Cu w0.3: v2(149.025,23.79) 149.025,41.115 150,42.09 v2(150.622,42.09)
unconnected-(U1-NC-Pad11): U1.11
pads on no net: H1.Un1 H2.Un1 H3.Un1 H4.Un1 J1.Un1 J1.Un2 J2.Un1 J2.Un2 U3.MP U4.MP
copper on no net: | length 1012.5
  F.Cu w0.254: 141.575,19.015 143.075,19.015 143.075,20.19 141.575,20.19 141.575,19.015 ; 142.936,51.97 152.904,51.97 152.904,56.465 142.936,56.465 142.936,51.97 ; 148.3,31.565 149.7,31.565 149.7,38.04 148.3,38.04 148.3,31.565 ; 148.325,22.69 149.675,22.69 149.675,25.34 148.325,25.34 148.325,22.69 ; 151.48,33.67 153.57,33.67 153.57,36.16 151.48,36.16 151.48,33.67 ; 152.688,46.415 155.212,46.415 155.212,47.165 152.688,47.165 152.688,46.415 ; 153.775,46.415 154.225,46.415 154.225,48.59 153.775,48.59 153.775,46.415 ; 154.042,22.69 155.425,22.69 155.425,25.34 154.042,25.34 154.042,22.69 ; 154.055,38.505 155.454,38.505 155.454,40.64 154.055,40.64 154.055,38.505 ; 156.062,46.415 158.588,46.415 158.588,47.165 156.062,47.165 156.062,46.415 ; 157.075,46.415 157.525,46.415 157.525,48.59 157.075,48.59 157.075,46.415
  F.SilkS w0.254: 196.1,4.79 ccw(c196.1,7.79) 199.1,7.79 ; 196.1,4.79 ccw(c196.1,7.79) 199.1,7.79 ; 196.1,4.79 106.6,4.79 cw(c106.6,7.79) 103.6,7.79 103.6,57.49 cw(c106.6,57.49) 106.6,60.49 196.1,60.49 cw(c196.1,57.49) 199.1,57.49 199.1,7.79
  B.SilkS w0.254: 196.1,60.49 cw(c196.1,57.49) 199.1,57.49 ; 196.1,60.49 cw(c196.1,57.49) 199.1,57.49 ; 196.1,60.49 106.6,60.49 ccw(c106.6,57.49) 103.6,57.49 103.6,7.79 ccw(c106.6,7.79) 106.6,4.79 196.1,4.79 ccw(c196.1,7.79) 199.1,7.79 199.1,57.49
  Edge.Cuts w0.254: 102.9,7.19 ccw(c105.9,7.19) 105.9,4.19 196.8,4.19 ccw(c196.8,7.19) 199.8,7.19 199.8,58.19 ccw(c196.8,58.19) 196.8,61.19 105.9,61.19 ccw(c105.9,58.19) 102.9,58.19 102.9,7.19

## Polygon pours and split planes (outlines as drawn)
PACK- on In1.Cu "In1.Cu-PACK-" (solid, remove dead copper, pour order 0): 102.81,60.722 102.937,3.826 199.802,3.826 199.802,60.722

## Keep-outs
In1.Cu:
  region: 199.721,4.269 188.253,4.269 188.253,15.737 199.721,15.737
  region: 113.5,4.649 102.832,4.649 102.832,15.317 113.5,15.317
  region: 113.6,50.09 102.932,50.09 102.932,60.758 113.6,60.758
  region: 199.9,50.09 189.232,50.09 189.232,60.758 199.9,60.758
In2.Cu:
  region: 199.721,4.269 188.253,4.269 188.253,15.737 199.721,15.737
  region: 113.5,4.649 102.832,4.649 102.832,15.317 113.5,15.317
  region: 113.6,50.09 102.932,50.09 102.932,60.758 113.6,60.758
  region: 199.9,50.09 189.232,50.09 189.232,60.758 199.9,60.758

## Other copper
F.Cu:
  region: 172.65,55.99 182.95,46.94 179.65,44.94 171.15,52.315 158.325,52.315 158.325,55.996
  region: 141.756,51.493 142.35,50.965 146.1,50.99 146.1,49.79 140.525,49.79 140.525,53.09 141.763,53.09
B.SilkS:
  text "BMS v0.3" at 189.6,7.96 h1.5

## Text inside footprints (layer, text, board x,y; h text height)
J1: F.SilkS "+" at 179.094,35.521 h1.5 r90; F.SilkS "-" at 178.852,48.002 h1.5 r90
J2: F.SilkS "+" at 123.219,35.421 h1.5 r90; F.SilkS "-" at 122.959,47.94 h1 r90